# Altium PCB 海关全向控制器主控板电路V3.PcbDoc (part 2 of 3)
Units mil, origin at the board's own origin, x right, y up, seen from the top; angles counter-clockwise.
Board outline 7874.02 x 2362.2 mil, 2 copper layers (Top Layer, Bottom Layer), stack 42.17 mil thick; 192 components, 119 nets, 573 pads, 115 vias.
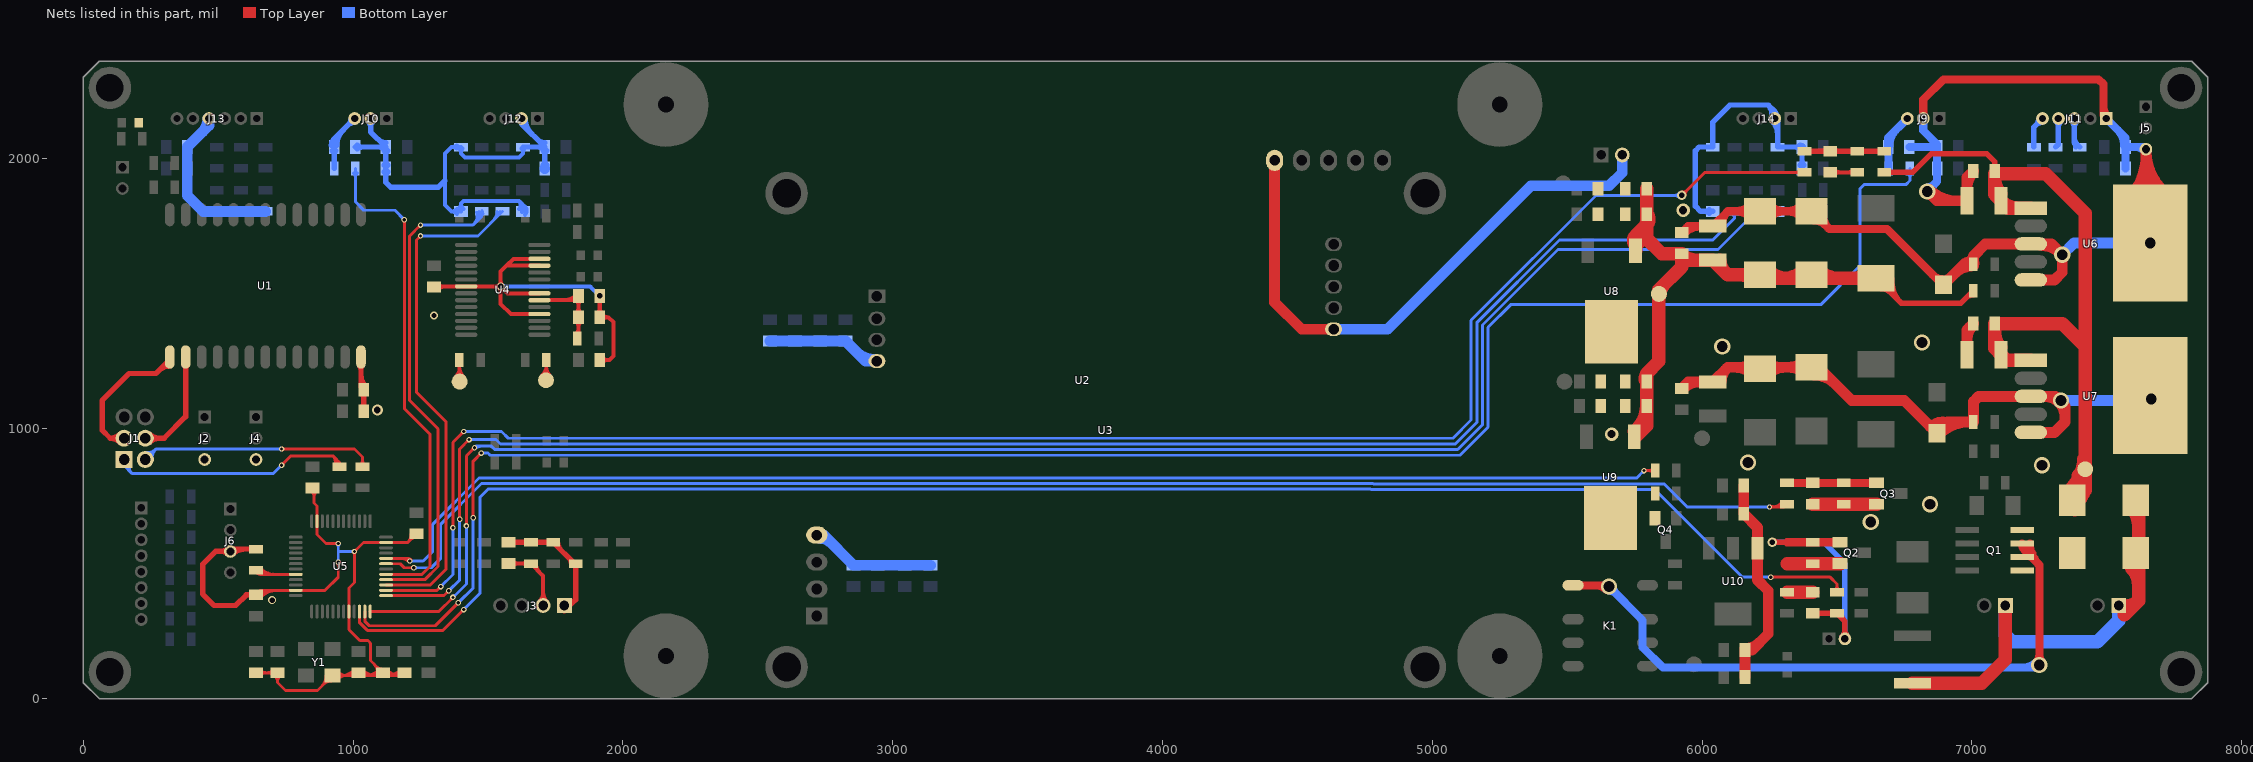
[diagram p2: the nets of this part, all layers, seen from the top]

## Via types
v1: diameter 20, hole 12, Top Layer to Bottom Layer, tented both sides, 70 vias
v2: diameter 60, hole 40, Top Layer to Bottom Layer, tented both sides, 26 vias
v3: diameter 50, hole 30, Top Layer to Bottom Layer, tented both sides, 9 vias
v4: diameter 30, hole 20, Top Layer to Bottom Layer, tented both sides, 5 vias
v5: diameter 40, hole 25, Top Layer to Bottom Layer, tented both sides, 3 vias
v6: diameter 35, hole 20, Top Layer to Bottom Layer, tented both sides, 2 vias

## Nets (pads, with @x,y where several pads share a name; then routed paths per layer and width w, separated by ;. In a path a pad name is that pad's centre, name@x,y a point inside that pad or via, vN(x,y) a via of type N, cw(c..) or ccw(c..) an arc to the next point about the centre after c; other vN are vias at no path point) (continued)
+7.2V: C25.1 C26.1 C27.1 C28.2 C42.1 C43.2 C46.1 C47.2 L2.2 pad.@5840,1500 R20.1 U8.1 U9.1 | length 3613.7
  Top Layer w20: L2.2@6645,1558.41 6738.41,1465 ; L2.2@6664.68,1519.2 cw(c6664.68,1472.06) 6698.02,1505.39 ; L2.2@6683.86,1557.27 ccw(c6763.03,1552.54) 6706.95,1496.46 ; L2.2@6703.83,1556.08 ccw(c6822.4,1549) 6738.41,1465 ; 6979.02,1485.31 cw(c7005.63,1458.69) R20.1@7005.63,1496.33 ; R20.1@7005.63,1511.92 6958.71,1465 6738.41,1465
  Top Layer w50: U9.1@5748.58,990.12 ccw(c5748.58,1050.19) 5791.06,1007.71 ; U9.1@5749.45,990.43 ccw(c5672.36,1084.99) C47.2@5794.37,1085 ; U8.1@5752.2,1681.5 cw(c5830.33,1681.5) 5775.09,1736.74 ; U8.1@5752.55,1680.58 cw(c5771.46,1697.36) 5753.58,1715.24 ; U9.1@5753.58,970.24 5794.37,1011.02 C47.2@5794.37,1085 ; U8.1@5753.58,1660.24 5753.58,1715.24 ; U8.1@5754.36,1680.36 ccw(c5702.82,1756.02) 5794.37,1756.02 ; 5780.06,1741.71 ccw(c5732.68,1789.09) C43.2@5799.69,1789.09 ; C46.1@5789.06,1180.91 cw(c5832.87,1180.91) 5801.89,1211.89 ; C42.1@5794.37,1890 C43.2@5794.37,1795 5794.37,1756.02 ; C43.2@5798.95,1791.78 cw(c5773.52,1776.87) 5794.37,1756.02 ; pad.@5844.53,1500 cw(c5891.67,1500) 5858.34,1533.34 ; 5925,1625.34 5925,1600 5840,1515 5840,1290 5840,1250 5794.37,1204.37 C46.1@5794.37,1175 C47.2@5794.37,1085 ; C28.2@5927.15,1645.2 ccw(c5975.1,1693.16) 5975.1,1625.34 ; C27.1@6066.18,1625.34 ccw(c6129.39,1625.34) 6084.69,1580.65 ; C26.1@6188.04,1553.1 ccw(c6146.7,1511.77) 6146.7,1570.22 ccw(c6146.7,1628.68) C26.1@6188.04,1587.34 ; C26.1@6241.96,1587.34 ccw(c6311.81,1657.19) 6311.81,1558.41 ; 6308.19,1558.41 ccw(c6308.19,1657.19) C25.1@6378.04,1587.34 ; C25.1@6431.96,1587.34 ccw(c6501.81,1657.19) 6501.81,1558.41 ; L2.2@6608.19,1541.29 ccw(c6566.86,1499.96) 6566.86,1558.41 ccw(c6566.86,1616.87) L2.2@6608.19,1575.53 ; L2.2@6645,1558.41 6226.81,1558.41 C26.1@6215,1570.22 6095.12,1570.22 C27.1@6040,1625.34 5948.62,1625.34 C28.2@5925,1648.96 5851.04,1648.96 5794.37,1705.63 5794.37,1756.02 ; 5753.58,1715.24 5794.37,1756.02
+12V: C23.1 C24.2 C30.1 C31.2 C32.1 C33.1 K1.1 pad.@7420,850 Q1.5 Q1.6 Q1.7 Q1.8 R31.1 U6.1 U7.1 | length 6140.2
  Top Layer w20: R31.1@6675,1950.63 6780.63,1950.63 6850,2020 7055,2020 7084.37,1990.63 C24.2@7084.37,1955 C24.2@7084.37,1945 ; C24.2@7077.52,1967.75 ccw(c7060.99,1984.29) 7084.37,1984.29 ccw(c7107.75,1984.29) C24.2@7091.22,1967.75
  Top Layer w30: K1.1@5522.2,419.61 5654.61,419.61 v2(5654.61,415.39) ; 5608.22,419.61 cw(c5608.22,369.01) v2@5644,404.79 ; Q1.7@7185.67,575 ccw(c7223.5,575) 7196.75,548.25 ; 7195,550 7250,495 v2(7250,125) ; Q1.7@7215.67,575 ccw(c7325.92,575) 7247.96,497.04 ; Q1.6@7219.4,528.14 cw(c7216.21,509.77) 7231.46,520.5 ; Q1.6@7221.55,523.29 ccw(c7205.51,533.46) 7224.04,537.61 ; v2@7239.39,135.61 ccw(c7213.79,161.21) 7250,161.21 ccw(c7286.21,161.21) v2@7260.61,135.61
  Top Layer w50: 7084.37,1356.26 ccw(c7161.69,1356.26) C30.1@7107.02,1301.58 ; 7084.37,1926.26 ccw(c7161.69,1926.26) C23.1@7107.02,1871.58 ; U6.1@7183.56,1818.33 cw(c7173.65,1910.65) C23.1@7107.99,1845 ; U7.1@7218.56,1253.33 7129.66,1253.33 C30.1@7107.99,1275 7084.37,1298.62 C31.2@7084.37,1390 7335,1390 7420,1305 ; U6.1@7218.56,1818.33 7134.66,1818.33 C23.1@7107.99,1845 ; C33.1@7354.77,761.96 ccw(c7197.29,919.45) 7420,919.45 ; C33.1@7381.89,700 7381.89,735 7420,773.11 7420,1305 ; C33.1@7390.12,726.61 ccw(c7318,798.73) 7420,798.73 ; 7394.59,826.5 cw(c7430.86,804.12) pad.@7421.04,845.59 ; 7414.68,886.49 ccw(c7457.04,879.64) pad.@7423.53,852.83 ; C23.1@7107.99,1845 7084.37,1868.62 7084.37,1945 7273.78,1945 7420,1798.78 7420,1305
  Bottom Layer w30: v2@5654.61,400.39 cw(c5654.61,364.18) 5680.21,389.79 cw(c5705.82,415.39) v2@5669.61,415.39 ; v2(5654.61,415.39) 5780,290 5780,190 5855,115 7240,115 v2(7250,125) ; 7189.64,115 ccw(c7189.64,185.36) v2@7239.39,135.61
AD1: R48.2 U5.15 | length 1964.2
  Top Layer w11: U5.15@1122.32,421.1 1286.1,421.1 1345,480 1345,1025 1235,1135 1235,1700 v1(1250,1715) ; v1@1245.5,1715 cw(c1234.64,1715) 1242.32,1707.32 cw(c1250,1699.64) v1@1250,1710.5
  Bottom Layer w11: v1(1250,1715) 1462.7,1715 R48.2@1553.33,1805.63 ; v1@1253.18,1711.82 cw(c1260.86,1704.14) 1260.86,1715 cw(c1260.86,1725.86) v1@1253.18,1718.18 ; 1519.04,1771.33 ccw(c1484.74,1805.63) R48.2@1533.24,1805.63 ; R48.2@1537.81,1790.11 ccw(c1522.3,1805.63) R48.2@1544.24,1805.63
AD2: R51.2 U5.16 | length 1978.5
  Top Layer w11: U5.16@1122.32,440.79 1265.79,440.79 1315,490 1315,1000 1210,1105 1210,1715 v1(1250,1755) ; v1@1245.5,1755 cw(c1234.64,1755) 1242.32,1747.32 cw(c1250,1739.64) v1@1250,1750.5
  Bottom Layer w11: v1(1250,1755) 1445,1755 ; v1@1253.18,1751.82 cw(c1260.86,1744.14) 1260.86,1755 cw(c1260.86,1765.86) v1@1253.18,1758.18 ; R51.2@1457.01,1802.68 cw(c1411.11,1788.89) 1445,1755 ; 1458.02,1768.02 ccw(c1431.13,1794.9) R51.2@1467.54,1805.85 ; 1471.03,1781.03 ccw(c1451.15,1800.92) R51.2@1478.08,1809.01 ; R51.2@1471.05,1797.06 cw(c1464.25,1786.67) 1476.67,1786.67 ; R51.2@1476.67,1805.63 1476.67,1786.67 ; R51.2@1482.28,1797.06 ccw(c1489.09,1786.67) 1476.67,1786.67 ; 1445,1755 1476.67,1786.67
AD3: R63.2 U5.12 | length 6420.3
  Top Layer w11: U5.12@1063.27,322.68 1317.68,322.68 v1(1370,375) ; v1@1365.5,375 cw(c1354.64,375) 1362.32,367.32 cw(c1370,359.64) v1@1370,370.5 ; v1@1416.82,643.18 ccw(c1409.14,650.86) 1420,650.86 ccw(c1430.86,650.86) v1@1423.18,643.18 ; v1(1420,640) 1420,900 v1(1450,930) ; v1@1445.5,930 cw(c1434.64,930) 1442.32,922.32 cw(c1450,914.64) v1@1450,925.5
  Bottom Layer w11: v1(1370,375) 1420,425 v1(1420,640) ; v1@1370,379.5 ccw(c1370,390.36) 1377.68,382.68 ccw(c1385.36,375) v1@1374.5,375 ; v1@1416.82,636.82 cw(c1409.14,629.14) 1420,629.14 cw(c1430.86,629.14) v1@1423.18,636.82 ; v1(1450,930) 1455.5,935.5 1512.5,935.5 1525,923 5094.21,923 5186,1014.79 5186,1384.79 5466.21,1665 6059.37,1665 R63.2@6200,1805.63 ; v1@1453.18,926.82 cw(c1474.14,905.86) 1474.14,935.5 ; 6165.7,1771.33 ccw(c6131.41,1805.63) R63.2@6179.91,1805.63 ; R63.2@6184.48,1790.11 ccw(c6168.96,1805.63) R63.2@6190.91,1805.63
AD4: R66.2 U5.13 | length 6257.8
  Top Layer w11: U5.13@1122.32,381.73 1336.73,381.73 v1(1355,400) ; v1@1350.5,400 cw(c1339.64,400) 1347.32,392.32 cw(c1355,384.64) v1@1355,395.5 ; v1@1391.82,668.18 ccw(c1384.14,675.86) 1395,675.86 ccw(c1405.86,675.86) v1@1398.18,668.18 ; v1(1395,665) 1395,925 v1(1430,960) ; v1@1425.5,960 cw(c1414.64,960) 1422.32,952.32 cw(c1430,944.64) v1@1430,955.5
  Bottom Layer w11: v1(1355,400) 1395,440 v1(1395,665) ; v1@1355,404.5 ccw(c1355,415.36) 1362.68,407.68 ccw(c1370.36,400) v1@1359.5,400 ; v1@1391.82,661.82 cw(c1384.14,654.14) 1395,654.14 cw(c1405.86,654.14) v1@1398.18,661.82 ; v1(1430,960) 1530,960 1546,944 5085.51,944 5165,1023.49 5165,1393.49 5471.51,1700 6040,1700 6120,1780 R66.2@6120,1805.63 ; v1@1433.18,956.82 cw(c1440.86,949.14) 1440.86,960 cw(c1440.86,970.86) v1@1433.18,963.18 ; R66.2@6112.75,1798.38 cw(c6095.26,1780.89) 6120,1780.89 cw(c6144.74,1780.89) R66.2@6127.25,1798.38
AD_KEY1: R36.1 U5.11 | length 7304.8
  Top Layer w11: U5.11@1043.58,322.68 1043.58,286.42 1060,270 1305,270 v1(1390,355) ; v1@1385.5,355 cw(c1374.64,355) 1382.32,347.32 cw(c1390,339.64) v1@1390,350.5 ; v1@1441.82,673.18 ccw(c1434.14,680.86) 1445,680.86 ccw(c1455.86,680.86) v1@1448.18,673.18 ; v1(1445,670) 1445,880 v1(1475,910) ; v1@1470.5,910 cw(c1459.64,910) 1467.32,902.32 cw(c1475,894.64) v1@1475,905.5
  Bottom Layer w11: v1(1390,355) 1445,410 v1(1445,670) ; v1@1390,359.5 ccw(c1390,370.36) 1397.68,362.68 ccw(c1405.36,355) v1@1394.5,355 ; v1@1441.82,666.82 cw(c1434.14,659.14) 1445,659.14 cw(c1455.86,659.14) v1@1448.18,666.82 ; v1(1475,910) 1500,910 1508,902 5102.9,902 5207,1006.1 5207,1376.1 5290.9,1460 6440,1460 6585,1605 6585,1890 6600,1905 6755,1905 6770.54,1920.54 R36.1@6770.54,1964.79 ; v1@1478.18,906.82 cw(c1485.86,899.14) 1485.86,910 cw(c1485.86,920.86) v1@1478.18,913.18 ; R36.1@6763.29,1947.7 cw(c6745.79,1930.21) 6770.54,1930.21 cw(c6795.28,1930.21) R36.1@6777.78,1947.7
AD_KEY2: R41.1 U5.17 | length 1904.6
  Top Layer w11: U5.17@1122.32,460.47 1255.47,460.47 1285,490 1285,980 1190,1075 v1(1190,1775) ; v1@1186.82,1771.82 cw(c1179.14,1764.14) 1190,1764.14 cw(c1200.86,1764.14) v1@1193.18,1771.82
  Bottom Layer w11: R41.1@1001.32,1947.7 cw(c983.83,1930.21) 1008.57,1930.21 cw(c1033.31,1930.21) R41.1@1015.81,1947.7 ; R41.1@1008.57,1964.79 1008.57,1841.43 1040,1810 1155,1810 v1(1190,1775) ; v1@1185.5,1775 ccw(c1174.64,1775) 1182.32,1782.68 ccw(c1190,1790.36) v1@1190,1779.5
AD_POW: R33.1 U5.14 | length 6656.1
  Top Layer w11: U5.14@1122.32,401.42 1311.42,401.42 v1(1325,415) ; v1@1320.5,415 cw(c1309.64,415) 1317.32,407.32 cw(c1325,399.64) v1@1325,410.5 ; v1@1366.82,636.18 ccw(c1359.14,643.86) 1370,643.86 ccw(c1380.86,643.86) v1@1373.18,636.18 ; v1(1370,633) 1370,950 v1(1410,990) ; v1@1405.5,990 cw(c1394.64,990) 1402.32,982.32 cw(c1410,974.64) v1@1410,985.5 ; v6(5925,1865) 6010.63,1950.63 R33.1@6380,1950.63 ; v6@5925,1877 ccw(c5925,1905.97) 5945.49,1885.49 ccw(c5965.97,1865) v6@5937,1865 ; R33.1@6362.91,1943.38 ccw(c6345.42,1925.89) 6345.42,1950.63 ccw(c6345.42,1975.37) R33.1@6362.91,1957.88
  Bottom Layer w11: v1(1325,415) 1370,460 v1(1370,633) ; v1@1325,419.5 ccw(c1325,430.36) 1332.68,422.68 ccw(c1340.36,415) v1@1329.5,415 ; v1@1366.82,629.82 cw(c1359.14,622.14) 1370,622.14 cw(c1380.86,622.14) v1@1373.18,629.82 ; v1(1410,990) 1550,990 1575,965 5076.81,965 5144,1032.19 5144,1402.19 5606.81,1865 v6(5925,1865) ; v1@1413.18,986.82 cw(c1420.86,979.14) 1420.86,990 cw(c1420.86,1000.86) v1@1413.18,993.18 ; v6@5916.51,1856.51 ccw(c5896.03,1836.03) 5896.03,1865 ccw(c5896.03,1893.97) v6@5916.51,1873.49
AD_POWKEY: R24.1 U5.10 | length 6237.7
  Top Layer w11: U5.10@1023.9,322.68 1023.9,281.1 1024.86,281.1 1052.96,253 1333,253 v1(1410,330) ; v1@1405.5,330 cw(c1394.64,330) 1402.32,322.32 cw(c1410,314.64) v1@1410,325.5 ; v1(6255,450) 6475,450 6500,425 R24.1@6500,394.37 ; v1@6258.18,446.82 cw(c6265.86,439.14) 6265.86,450 cw(c6265.86,460.86) v1@6258.18,453.18 ; R24.1@6492.75,401.62 ccw(c6475.26,419.11) 6500,419.11 ccw(c6524.74,419.11) R24.1@6507.25,401.62
  Bottom Layer w11: v1(1410,330) 1470.5,390.5 1470.5,746.56 1499.94,776 4771.89,776 4772.89,775 5825,775 6150,450 v1(6255,450) ; v1@1410,334.5 ccw(c1410,345.36) 1417.68,337.68 ccw(c1425.36,330) v1@1414.5,330 ; v1@6251.82,446.82 ccw(c6244.14,439.14) 6244.14,450 ccw(c6244.14,460.86) v1@6251.82,453.18
AGND1: J16.2 U2.5 U3.9 | length 2161.9
  Top Layer w40: U2.5@4415.78,1994.98 4415.78,1469.22 4515.98,1369.02 U3.9@4634.49,1369.02
  Bottom Layer w40: U3.9@4634.49,1369.02 4834.02,1369.02 5365.5,1900.5 5655.5,1900.5 5704.37,1949.37 J16.2@5704.37,2015
BOOT0: R18.2 U5.44 | length 271.6
  Top Layer w11: R18.2@640,475.63 655.16,460.47 U5.44@787.68,460.47 ; R18.2@641.53,467.32 ccw(c658.06,483.85) R18.2@658.06,460.47 ; R18.2@649.31,475.1 ccw(c684.62,510.41) 684.62,460.47 ; R18.2@657.09,482.88 ccw(c711.18,536.96) 711.18,460.47
BT_RX: J1.4 U1.2 | length 505
  Top Layer w20: J1.4@230,965 300,965 379.72,1044.72 U1.2@379.72,1256.22 ; J1.4@245.2,949.8 cw(c281.9,913.1) 281.9,965 cw(c281.9,1016.9) J1.4@245.2,980.2 ; U1.2@374.27,1235.17 cw(c361.09,1222) 379.72,1222 cw(c398.35,1222) U1.2@385.18,1235.17
BT_TX: J1.3 U1.1 | length 641.2
  Top Layer w20: J1.3@135.93,949.93 ccw(c100,914.64) 100,965 ; J1.3@135.93,980.07 cw(c100,1015.36) 100,965 ; J1.3@151.26,965 100,965 ; 280.88,1216.43 cw(c320.67,1176.65) U1.1@320.67,1232.91 ; U1.1@320.67,1256.22 269.45,1205 170,1205 70,1105 70,995 100,965
CTRPOW: R27.1 U5.19 | length 5597.6
  Top Layer w11: U5.19@1122.32,499.84 1175.16,499.84 1190,485 v1(1225,485) ; v1@1221.82,481.82 ccw(c1214.14,474.14) 1214.14,485 ccw(c1214.14,495.86) v1@1221.82,488.18 ; v1(6250,710) 6304.35,710 R27.1@6315,720.65 ; v1@6252.25,713.9 ccw(c6259.76,726.9) 6263.64,712.4 ; v1@6253.18,706.82 cw(c6260.86,699.14) 6260.86,710 cw(c6260.86,720.86) v1@6253.18,713.18 ; v1@6254.7,710 ccw(c6254.7,771.11) R27.1@6297.91,727.9 ; 6281.25,710 ccw(c6281.25,744.56) R27.1@6305.69,720.12
  Bottom Layer w11: v1(1225,485) 1290,485 1325,520 1325,646.21 1475.79,797 4780.59,797 4781.59,796 5859,796 5945,710 v1(6250,710) ; v1@1228.18,481.82 cw(c1235.86,474.14) 1235.86,485 cw(c1235.86,495.86) v1@1228.18,488.18 ; v1@6246.82,706.82 ccw(c6239.14,699.14) 6239.14,710 ccw(c6239.14,720.86) v1@6246.82,713.18
CTRVBT: R30.1 U5.20 | length 5060.4
  Top Layer w11: U5.20@1122.32,519.53 1200.47,519.53 v1(1210,510) ; 1176.14,519.53 cw(c1176.14,476.14) v1@1206.82,506.82 ; 1202.69,519.53 cw(c1202.69,502.69) v1@1214.6,514.6 ; v1@1205.5,510 ccw(c1194.64,510) 1202.32,517.68 ccw(c1210,525.36) v1@1210,514.5 ; v1(5785,845) R30.1@5825.63,845 ; v1@5788.18,841.82 cw(c5795.86,834.14) 5795.86,845 cw(c5795.86,855.86) v1@5788.18,848.18 ; R30.1@5818.38,837.75 ccw(c5800.89,820.26) 5800.89,845 ccw(c5800.89,869.74) R30.1@5818.38,852.25
  Bottom Layer w11: v1(1210,510) 1260,510 1295,545 1295,645.9 1467.1,818 4789.29,818 4790.29,817 5757,817 v1(5785,845) ; v1@1213.18,506.82 cw(c1220.86,499.14) 1220.86,510 cw(c1220.86,520.86) v1@1213.18,513.18 ; v1@5780.5,845 cw(c5769.64,845) 5777.32,837.32 cw(c5785,829.64) v1@5785,840.5
DATA_RX: J1.2 R40.2 | length 1067.1
  Top Layer w11: v1(735,925) 1005,925 1035,895 R40.2@1035,859.37 ; v1@738.18,921.82 cw(c745.86,914.14) 745.86,925 cw(c745.86,935.86) v1@738.18,928.18 ; R40.2@1027.75,866.62 ccw(c1010.26,884.11) 1035,884.11 ccw(c1059.74,884.11) R40.2@1042.25,866.62
  Bottom Layer w11: J1.2@230,886.26 268.74,925 ; J1.2@231.51,901.18 ccw(c234.1,926.85) 252.35,908.61 ccw(c270.59,890.36) J1.2@244.92,887.77 ; J1.2@232.61,912.12 ccw(c237.11,956.63) 268.74,925 ; J1.2@255.86,888.87 cw(c300.37,893.37) 268.74,925 ; v1@731.82,921.82 ccw(c724.14,914.14) 724.14,925 ccw(c724.14,935.86) v1@731.82,928.18 ; v1(735,925) 268.74,925
DATA_TX: J1.1 R39.2 | length 1096.7
  Top Layer w11: v1(735,865) 770,900 925,900 ; v1@735,869.5 ccw(c735,880.36) 742.68,872.68 ccw(c750.36,865) v1@739.5,865 ; R39.2@930.97,863.9 ccw(c902.79,877.79) 925,900 ; 935.86,889.14 cw(c917.33,870.62) R39.2@940.83,859.04 ; 946.72,878.28 cw(c931.88,863.45) R39.2@950.7,854.17 ; R39.2@950,859.37 950,875 925,900
  Bottom Layer w11: J1.1@151.26,886.26 151.26,863.74 180,835 ; J1.1@164.49,879.2 ccw(c189.74,865.73) 169.5,845.5 ; J1.1@174.2,874.02 ccw(c203.42,858.43) 180,835 ; v1@730.5,865 cw(c719.64,865) 727.32,857.32 cw(c735,849.64) v1@735,860.5 ; v1(735,865) 705,835 180,835
DIG_RX: J11.3 R42.1 | length 243.4
  Bottom Layer w20: J11.3@7370.37,2140.37 cw(c7347.11,2117.11) 7380,2117.11 cw(c7412.89,2117.11) J11.3@7389.63,2140.37 ; 7380,2082.77 ccw(c7428.56,2082.77) R42.1@7394.22,2048.43 ; J11.3@7380,2150 7380,2064.37 ; R42.1@7384.65,2046.01 ccw(c7366.92,2051.29) 7380,2064.37 ; R42.1@7391.45,2049.97 cw(c7394.78,2064.37) 7380,2064.37 ; R42.1@7400,2044.37 7380,2064.37
DIG_SET: J11.5 R44.1 | length 170.5
  Bottom Layer w20: R44.1@7230,2044.37 7230,2118.11 J11.5@7261.89,2150 ; J11.5@7248.27,2150 cw(c7215.38,2150) 7238.64,2126.75 cw(c7261.89,2103.49) J11.5@7261.89,2136.38
DIG_TX: J11.4 R43.1 | length 175.7
  Bottom Layer w20: R43.1@7310,2044.37 7320.94,2055.31 J11.4@7320.94,2150 ; J11.4@7311.31,2140.37 cw(c7288.06,2117.11) 7320.94,2117.11 cw(c7353.83,2117.11) J11.4@7330.58,2140.37 ; R43.1@7315.78,2048.43 ccw(c7303.3,2060.91) 7320.94,2060.91
FT_D+: pad.@1715,1180 R13.2 | length 234.1
  Top Layer w11: pad.@1698.01,1196.99 ccw(c1653.57,1241.43) R13.2@1716.42,1241.43 ; pad.@1705.79,1189.21 ccw(c1680.13,1214.87) 1716.42,1214.87 ; R13.2@1709.17,1237.91 cw(c1691.68,1220.42) 1716.42,1220.42 cw(c1741.16,1220.42) R13.2@1723.66,1237.91 ; pad.@1715,1180 1716.42,1181.42 R13.2@1716.42,1255 ; R13.2@1716.42,1234.59 ccw(c1769.59,1234.59) pad.@1731.99,1196.99
FT_D-: pad.@1395,1175 R12.2 | length 239.1
  Top Layer w11: pad.@1378.01,1191.99 ccw(c1340.41,1229.59) R12.2@1393.58,1229.59 ; R12.2@1386.34,1237.91 cw(c1368.84,1220.42) 1393.58,1220.42 cw(c1418.32,1220.42) R12.2@1400.83,1237.91 ; 1393.58,1209.87 ccw(c1429.87,1209.87) pad.@1404.21,1184.21 ; R12.2@1393.58,1236.43 ccw(c1456.43,1236.43) pad.@1411.99,1191.99 ; R12.2@1393.58,1255 1393.58,1176.42 pad.@1395,1175
FT_VCC: C10.1 C11.2 R11.1 U4.20 | length 547.1
  Top Layer w15: U4.20@1690.83,1476.61 1819.8,1476.61 C11.2@1835.63,1492.44 C10.1@1835.63,1413.29 1835.63,1338.08 R11.1@1831.69,1334.15 ; 1782.26,1476.61 ccw(c1782.26,1539.91) C11.2@1827.01,1495.15 ; C11.2@1818.47,1476.61 ccw(c1818.47,1503.69) C11.2@1837.62,1484.55 ; R11.1@1825.86,1349.82 ccw(c1802.28,1373.41) 1835.63,1373.41 ; C10.1@1827.01,1398.77 cw(c1806.21,1377.97) 1835.63,1377.97 cw(c1865.05,1377.97) C10.1@1844.25,1398.77 ; C10.1@1827.01,1427.82 ccw(c1806.21,1448.62) 1835.63,1448.62 ccw(c1865.05,1448.62) C10.1@1844.25,1427.82 ; C11.2@1827.01,1477.92 cw(c1806.21,1457.12) 1835.63,1457.12 cw(c1865.05,1457.12) C11.2@1844.25,1477.92
GND: C1.2 C2.1 C3.2 C4.2 C5.1 C6.2 C7.2 C8.2 C9.1 C10.2 C11.1 C12.1 C13.2 C14.1 C15.2 C16.2 C17.2 C18.2 C19.2 C20.1 C21.1 C23.2 C24.1 C25.2 C26.2 C27.2 C28.1 C30.2 C31.1 C32.2 C33.2 C34.2 C35.2 C36.2 C37.2 C38.1 C39.1 C40.1 C41.1 C42.2 C43.1 C44.2 C45.1 C46.2 C47.1 C48.2 C49.1 C50.2 C51.1 C52.2 C53.1 C54.2 C55.2 C56.2 C57.2 C58.2 C59.2 C60.2 C61.2 C62.1 C63.1 C64.2 C65.2 C66.2 C67.2 C68.1 C69.1 C70.2 C71.2 C73.2 D1.2 D6.2 D7.1 D9.1 J2.3 J3.2 J4.3 J5.3 J6.3 J7.1 J8.1 J9.2 J10.2 J11.1 J12.2 J13.4 J14.2 Q2.2 Q3.2 Q4.2 R8.2 R18.1 R19.2 R23.2 R26.2 R28.2 R32.2 R34.1 R35.1 R54.2 R55.1 R56.1 R57.1 R58.1 R70.2 R71.1 U1.13 U2.4 U3.4 U4.7 U4.18 U4.21 U4.25 U4.26 U5.8 U5.23 U5.35 U5.47 U6.0 U6.3 U6.5 U7.0 U7.3 U7.5 U8.2 U9.2 U10.1 Y1.2 | length 26018.7
  Top Layer w11: C20.1@640,95.63 C21.1@720,95.63 720,60 750,30 868.43,30 Y1.2@924.21,85.79 1180.93,85.79 C14.1@1190.77,95.63 ; C16.2@640,384.37 657.05,401.42 U5.47@787.68,401.42 896.42,401.42 945,450 v1(945,505) ; C16.2@640.38,389.9 cw(c668.19,362.08) 668.19,401.42 ; C16.2@648.16,382.12 cw(c694.75,335.53) 694.75,401.42 ; C20.1@655.94,85.6 cw(c680.15,61.38) 680.15,95.63 cw(c680.15,129.88) C20.1@655.94,105.66 ; C16.2@655.94,374.34 cw(c721.31,308.97) 721.31,401.42 ; C21.1@704.06,85.6 ccw(c679.85,61.38) 679.85,95.63 ccw(c679.85,129.88) C21.1@704.06,105.66 ; C21.1@709.97,85.6 cw(c685.75,61.38) 720,61.38 cw(c754.25,61.38) C21.1@730.03,85.6 ; C17.2@845.88,770.6 cw(c823.85,748.57) 855,748.57 ; 855,744.2 cw(c892.34,744.2) C17.2@865.94,770.6 ; C17.2@855,775.63 855,725 866.42,713.58 U5.35@866.42,657.32 866.42,608.18 899.59,575 v1(945,575) ; 883.2,44.77 ccw(c842.18,85.79) Y1.2@900.19,85.79 ; 892.7,54.27 cw(c920.28,26.7) Y1.2@920.28,65.7 ; Y1.2@901.97,63.55 ccw(c879.73,85.79) Y1.2@911.19,85.79 ; v1@941.82,501.82 cw(c934.14,494.14) 945,494.14 cw(c955.86,494.14) v1@948.18,501.82 ; v1@941.82,571.82 ccw(c934.14,564.14) 934.14,575 ccw(c934.14,585.86) v1@941.82,578.18 ; Y1.2@942.36,71.58 cw(c976.65,37.28) 976.65,85.79 cw(c976.65,134.29) Y1.2@942.36,99.99 ; 956.09,85.79 ccw(c956.09,153.64) C19.2@1004.06,105.66 ; 982.64,85.79 ccw(c982.64,127.08) C19.2@1011.84,97.88 ; v1@1001.82,541.82 cw(c994.14,534.14) 1005,534.14 cw(c1015.86,534.14) v1@1008.18,541.82 ; v1@1005,549.5 ccw(c1005,560.36) 1012.68,552.68 ccw(c1020.36,545) v1@1009.5,545 ; C19.2@1028.16,97.88 ccw(c1057.36,127.08) 1057.36,85.79 ; C19.2@1035.94,105.66 ccw(c1083.91,153.64) 1083.91,85.79 ; 1046.47,85.79 ccw(c1046.47,153.64) C15.2@1094.45,105.66 ; 1073.03,85.79 ccw(c1073.03,127.08) C15.2@1102.23,97.88 ; 1076.09,129.93 cw(c1041.79,95.63) C15.2@1090.3,95.63 ; 1090.35,115.67 ccw(c1104.48,129.8) C15.2@1104.48,109.81 ; C15.2@1110.39,95.63 1065,141.02 1065,205 1055,215 1025,215 984.53,255.47 U5.8@984.53,322.68 984.53,409.53 1005,430 v1(1005,545) 1038.58,578.58 U5.23@1122.32,578.58 1202.95,578.58 ; C15.2@1118.54,97.88 ccw(c1147.74,127.08) 1147.74,85.79 ; C15.2@1126.32,105.66 ccw(c1174.3,153.64) C14.1@1174.3,85.79 ; C15.2@1126.86,85.79 ccw(c1126.86,153.64) C14.1@1174.84,105.66 ; 1153.41,85.79 ccw(c1153.41,127.08) C14.1@1182.61,97.88 ; 1214.96,590.59 cw(c1229.09,576.46) C18.2@1229.09,596.44 ; C18.2@1214.93,609.86 cw(c1173.9,607.64) 1202.95,578.58 ; C18.2@1235,610.63 1202.95,578.58
  Top Layer w15: C13.2@1300,1525.63 1302.17,1527.8 U4.7@1419.17,1527.8 v4(1547.2,1527.8) ; C13.2@1314.52,1517.01 cw(c1340.55,1490.98) 1340.55,1527.8 ; C13.2@1314.52,1534.25 ccw(c1330.09,1549.82) 1330.09,1527.8 ; v4@1547.2,1520.3 cw(c1547.2,1502.19) 1560.01,1514.99 cw(c1572.81,1527.8) v4@1554.7,1527.8 ; v4@1552.51,1522.49 ccw(c1565.31,1509.69) 1547.2,1509.69 ccw(c1529.1,1509.69) 1541.9,1522.49 ccw(c1529.1,1509.69) 1529.1,1527.8 ccw(c1529.1,1545.9) 1541.9,1533.1 ccw(c1529.1,1545.9) 1547.2,1545.9 ccw(c1565.31,1545.9) v4@1552.51,1533.1 ; C6.2@1576,500.63 R8.2@1659,500.63 1704.37,455.26 J3.2@1704.37,325 ; C6.2@1590.52,492.01 cw(c1611.32,471.21) 1611.32,500.63 cw(c1611.32,530.05) C6.2@1590.52,509.25 ; R8.2@1643.32,494.8 ccw(c1629.24,480.72) 1629.24,500.63 ccw(c1629.24,520.54) R8.2@1643.32,506.46 ; R8.2@1677.09,500.63 ccw(c1720.76,500.63) 1689.88,469.75 ; J3.2@1690.19,359.18 ccw(c1655.94,393.43) 1704.37,393.43 ccw(c1752.8,393.43) J3.2@1718.55,359.18 ; U4.18@1690.83,1425.43 1584.57,1425.43 1547.2,1462.8 v4(1547.2,1527.8) ; U4.21@1690.83,1502.2 1572.8,1502.2 v4(1547.2,1527.8) ; U4.25@1690.83,1604.57 1569.57,1604.57 ; U4.26@1690.83,1630.16 1595.16,1630.16 1569.57,1604.57 ; C10.2@1905.75,1427.82 ccw(c1884.95,1448.62) 1914.37,1448.62 ccw(c1943.79,1448.62) C10.2@1922.99,1427.82 ; C11.1@1905.75,1477.92 cw(c1884.95,1457.12) 1914.37,1457.12 cw(c1943.79,1457.12) C11.1@1922.99,1477.92 ; C11.1@1909.07,1487.14 cw(c1896.26,1474.34) 1914.37,1474.34 cw(c1932.48,1474.34) C11.1@1919.67,1487.14 ; C12.1@1914.37,1255 1950,1255 1965,1270 1965,1395 1946.71,1413.29 C10.2@1914.37,1413.29 v4(1914.37,1492.44) ; C12.1@1922.99,1246.38 cw(c1943.79,1225.58) 1943.79,1255 cw(c1943.79,1284.42) C12.1@1922.99,1263.62 ; C10.2@1922.99,1404.68 cw(c1943.79,1383.88) 1943.79,1413.29 cw(c1943.79,1442.71) C10.2@1922.99,1421.91 ; C41.1@6475,1950.63 R34.1@6575,1950.63 ; C41.1@6489.52,1942.01 cw(c6510.32,1921.21) 6510.32,1950.63 cw(c6510.32,1980.05) C41.1@6489.52,1959.25 ; R34.1@6559.33,1944.8 ccw(c6545.25,1930.72) 6545.25,1950.63 ccw(c6545.25,1970.54) R34.1@6559.33,1956.46 ; v4(1547.2,1527.8) 1547.2,1582.2 1569.57,1604.57
  Top Layer w20: J6.3@535.37,536 ccw(c512.11,512.74) 512.11,545.63 ccw(c512.11,578.52) J6.3@535.37,555.26 ; J6.3@554.63,536 cw(c598.99,491.64) 598.99,554.37 ; C16.2@627.25,377.52 ccw(c610.71,360.99) 610.71,384.37 ccw(c610.71,407.75) C16.2@627.25,391.22 ; C16.2@640,384.37 604.37,384.37 565,345 485,345 442.5,387.5 442.5,497.5 490.63,545.63 J6.3@545,545.63 553.74,554.37 R18.1@640,554.37 ; U1.13@1023.87,1235.17 cw(c1010.7,1222) 1029.33,1222 cw(c1047.96,1222) U1.13@1034.79,1235.17 ; 1029.33,1198.52 ccw(c1086.99,1198.52) C2.1@1046.22,1157.75 ; U1.13@1029.33,1256.22 1029.33,1155.04 C2.1@1039.37,1145 C1.2@1039.37,1065 ; C1.2@1032.52,1077.75 ccw(c1015.99,1094.29) 1039.37,1094.29 ccw(c1062.75,1094.29) C1.2@1046.22,1077.75 ; C2.1@1032.52,1132.25 cw(c1015.99,1115.71) 1039.37,1115.71 cw(c1062.75,1115.71) C2.1@1046.22,1132.25
  Top Layer w30: C28.1@5925,1727.7 5948.62,1751.33 C27.2@6040,1751.33 6095.12,1806.44 ; C28.1@5934.22,1724.39 cw(c5999.24,1659.36) C27.2@5999.24,1751.33 ; C28.1@5935.59,1727.7 cw(c5961.16,1727.7) C28.1@5943.08,1745.78 ; C27.2@6076.13,1752.28 cw(c6141.94,1759.62) 6095.12,1806.44 ; C26.2@6180.97,1782.25 ccw(c6122.56,1723.85) 6122.56,1806.44 ccw(c6122.56,1889.04) C26.2@6180.97,1830.64 ; C26.2@6249.03,1782.25 cw(c6307.44,1723.85) 6307.44,1806.44 cw(c6307.44,1889.04) C26.2@6249.03,1830.64 ; C25.2@6370.97,1782.25 ccw(c6312.56,1723.85) 6312.56,1806.44 ccw(c6312.56,1889.04) C25.2@6370.97,1830.64 ; C25.2@6414.84,1772.23 cw(c6414.84,1713.4) 6456.44,1755 ; C25.2@6448.89,1803.07 ccw(c6526.8,1795.36) 6471.44,1740 ; J9.2@6820,2150 6820,2220 6895,2295 7470,2295 7487.68,2277.32 7487.68,2162.32 J11.1@7498.11,2151.89 ; 6854.61,1570.39 ccw(c6895,1610.79) D7.1@6895,1553.66 ; D7.1@6895,1534.21 6890.79,1534.21 6685,1740 6471.44,1740 ; 7487.68,2196 ccw(c7544.11,2196) J11.1@7504.21,2156.1 ; 6095.12,1806.44 C26.2@6215,1806.44 C25.2@6405,1806.44 6471.44,1740
  Top Layer w40: U9.2@5650.63,655.39 U9.2@5665,669.76 ; C38.1@5925,1149.37 5948.62,1172.99 C37.2@6040,1172.99 6095.12,1228.11 C35.2@6405,1228.11 6431.89,1228.11 6555,1105 6749.21,1105 D9.1@6870,984.21 6910.79,1025 R23.2@7005.63,1025 7005.63,1100.63 7025,1120 U7.3@7218.56,1120 7310,1120 7345,1085 7345,1025 7306.67,986.67 U7.5@7218.56,986.67 ; C38.1@5930.68,1149.59 cw(c5987.17,1093.1) 5987.17,1172.99 ; C37.2@6071.18,1172.99 cw(c6146.46,1172.99) 6093.23,1226.22 ; 6122.56,1228.11 cw(c6122.56,1140.51) C36.2@6184.5,1202.45 ; 6146.7,1228.11 ccw(c6146.7,1281.56) C36.2@6184.5,1243.77 ; C51.1@6154.37,790 6154.37,685.63 6205.55,634.45 U10.1@6205.55,557.05 6205.55,439.45 6245,400 6245,240 6185,180 C53.1@6159.37,180 C52.2@6159.37,80 ; C53.1@6159.37,185.59 ccw(c6159.37,260.96) 6212.67,207.67 ; C36.2@6245.5,1202.45 cw(c6307.44,1140.51) 6307.44,1228.11 ; C36.2@6245.5,1243.77 ccw(c6283.3,1281.56) 6283.3,1228.11 ; C35.2@6374.5,1207.45 ccw(c6324.63,1157.58) 6324.63,1228.11 ccw(c6324.63,1298.64) C35.2@6374.5,1248.77 ; C35.2@6414.84,1198.9 cw(c6414.84,1087.22) 6493.81,1166.19 ; v2(6835,1880) 6870,1845 C23.2@6982.01,1845 6982.01,1931.38 C24.1@7005.63,1955 ; v2@6842.07,1887.07 ccw(c6943.64,1988.64) 6943.64,1845 ; D9.1@6845.33,1008.88 ccw(c6870,1033.54) 6870,998.66 ccw(c6870,1033.54) D9.1@6894.67,1008.88 ; D9.1@6849.84,1007.32 cw(c6892.53,964.64) 6892.53,1025 ; D9.1@6878.13,979.04 cw(c6989.09,868.07) 6989.09,1025 ; D7.1@6895,1534.21 6970.79,1610 ; D7.1@6895,1548.66 ccw(c6895,1583.54) D7.1@6919.67,1558.88 ; 6936.61,1575.82 cw(c7005.63,1506.8) R19.2@7005.63,1604.41 ; C30.2@6982.01,1275 6982.01,1366.38 C31.1@7005.63,1390 ; 6982.01,1327.83 cw(c7061.9,1327.83) C31.1@7005.41,1384.32 ; 6982.01,1354.57 cw(c7012.68,1354.57) C31.1@7005.56,1384.4 ; C23.2@6982.01,1892.83 cw(c7061.9,1892.83) C24.1@7005.41,1949.32 ; 6982.01,1919.57 cw(c7012.68,1919.57) C24.1@7005.56,1949.4 ; R19.2@7001.38,1619.84 cw(c7041.3,1619.84) 7013.07,1648.07 ; R19.2@7008.02,1613.52 ccw(c6991.53,1589.26) 6970.79,1610 ; U6.5@7218.56,1551.67 7306.67,1551.67 7335,1580 v2(7335,1645) 7295,1685 U6.3@7218.56,1685 7050,1685 7005.63,1640.63 R19.2@7005.63,1610 6970.79,1610 ; U6.3@7253.56,1680 cw(c7253.56,1567.89) v2@7332.84,1647.16 ; U7.3@7269.64,1120 cw(c7269.64,1044.64) 7322.93,1097.93 cw(c7269.64,1044.64) 7345,1044.64 ; U6.0@7578.14,1850.37 ccw(c7416.74,2011.77) 7645,2011.77 ; U6.0@7606.43,1822.08 ccw(c7513.31,1915.2) 7645,1915.2 ; U6.0@7645,1752.16 ccw(c7725.26,1752.16) U6.0@7668.51,1695.4 ; 7645,1956.04 ccw(c7803.78,1956.04) U6.0@7708.25,1829.21 ; v2(7661.44,1688.33) 7645,1704.77 J5.3@7645,2036.26 ccw(c7864.21,2036.25) U6.0@7732.31,1861.16
  Top Layer w50: R35.1@6315,394.37 C39.1@6410,394.37 ; 6315,500.63 Q2.2@6511.69,500.63 ; C40.1@6410,720.65 R28.2@6525,720.65 Q3.2@6646.67,720.65 ; D6.2@6780,56.42 7036.42,56.42 7124.37,144.37 J8.1@7124.37,345 ; J7.1@7545.27,347.39 ccw(c7569.51,411.71) 7618.11,363.11 ; 7565,310 7618.11,363.11 ; C33.2@7590.99,708.04 cw(c7525.51,642.56) 7618.11,642.56 ; C32.2@7592.9,483.04 cw(c7532.03,422.17) 7618.11,422.17 ; C32.2@7592.9,536.96 ccw(c7532.03,597.83) C32.2@7618.11,597.83 ; C33.2@7618.11,700 7618.11,363.11
  Bottom Layer w11: v1@941.82,508.18 ccw(c934.14,515.86) 945,515.86 ccw(c955.86,515.86) v1@948.18,508.18 ; v1@941.82,571.82 cw(c934.14,564.14) 945,564.14 cw(c955.86,564.14) v1@948.18,571.82 ; v1(945,505) 945,545 ; v1(945,575) 945,545 ; v1@1001.82,541.82 ccw(c994.14,534.14) 994.14,545 ccw(c994.14,555.86) v1@1001.82,548.18 ; v1(1005,545) 945,545
  Bottom Layer w15: R55.1@1384.33,2038.54 ccw(c1370.25,2024.46) 1370.25,2044.37 ccw(c1370.25,2064.28) R55.1@1384.33,2050.2 ; C67.2@1385.48,1797.01 ccw(c1364.68,1776.21) 1364.68,1805.63 ccw(c1364.68,1835.05) C67.2@1385.48,1814.25 ; C67.2@1391.39,1814.26 ccw(c1370.7,1835) 1400,1835 ; R55.1@1394.17,2038.54 cw(c1380.09,2024.46) 1400,2024.46 cw(c1419.91,2024.46) R55.1@1405.83,2038.54 ; C67.2@1408.61,1814.26 cw(c1429.3,1835) 1400,1835 ; v4(1547.2,1527.8) 1879.02,1527.8 v4(1914.37,1492.44) ; v4@1552.51,1522.49 cw(c1565.31,1509.69) 1565.31,1527.8 cw(c1565.31,1545.9) v4@1552.51,1533.1 ; C66.2@1615.31,1814.07 ccw(c1599.38,1829.38) 1615,1845 ; C66.2@1622.69,1815.38 ccw(c1611.72,1830) 1630,1830 ; R54.2@1624.17,2038.54 cw(c1610.09,2024.46) 1630,2024.46 cw(c1649.91,2024.46) R54.2@1635.83,2038.54 ; 1625.82,1834.18 cw(c1610.42,1818.77) C66.2@1626.12,1803.68 ; C66.2@1630,1805.63 1630,1830 ; R54.2@1630,2044.37 1630,2020 1615,2005 1415,2005 1400,2020 R55.1@1400,2044.37 1364.37,2044.37 1340,2020 1340,1920 1340,1830 1364.37,1805.63 C67.2@1400,1805.63 1400,1835 ; C66.2@1636.64,1823.36 cw(c1621.45,1808.17) C66.2@1636.94,1793.29 ; C66.2@1637.31,1815.38 cw(c1648.28,1830) 1630,1830 ; v4@1906.87,1492.44 ccw(c1888.76,1492.44) 1901.57,1505.25 ccw(c1914.37,1518.05) v4@1914.37,1499.94 ; 1400,1835 1410,1845 1615,1845 ; 1615,1845 1630,1830
  Bottom Layer w20: C59.2@1008.57,2044.37 C58.2@1121.43,2044.37 ; C59.2@1015.42,2037.52 cw(c1031.95,2020.99) 1031.95,2044.37 cw(c1031.95,2067.75) C59.2@1015.42,2051.22 ; J10.2@1055.37,2140.37 cw(c1032.11,2117.11) 1065,2117.11 cw(c1097.89,2117.11) J10.2@1074.63,2140.37 ; J10.2@1065,2150 1065,2100.8 C58.2@1121.43,2044.37 ; 1094.82,2070.98 ccw(c1121.43,2097.6) C58.2@1121.43,2059.96 ; C57.2@1114.58,1952.04 cw(c1098.05,1935.5) 1121.43,1935.5 cw(c1144.81,1935.5) C57.2@1128.28,1952.04 ; C57.2@1114.58,1977.54 ccw(c1098.05,1994.08) 1121.43,1994.08 ccw(c1144.81,1994.08) C57.2@1128.28,1977.54 ; C58.2@1114.58,2031.62 cw(c1098.05,2015.08) 1121.43,2015.08 cw(c1144.81,2015.08) C58.2@1128.28,2031.62 ; C58.2@1114.58,2037.52 ccw(c1098.05,2020.99) 1098.05,2044.37 ccw(c1098.05,2067.75) C58.2@1114.58,2051.22 ; 1340,1920 1315,1895 1140,1895 1121.43,1913.57 C57.2@1121.43,1964.79 C58.2@1121.43,2044.37 ; J12.2@1624.53,2150 1624.53,2130.47 C63.1@1710.63,2044.37 ; R54.2@1630,2044.37 C63.1@1710.63,2044.37 ; J12.2@1638.15,2150 ccw(c1718.18,2150) 1661.59,2093.41 ; 1684.02,2070.98 ccw(c1710.63,2097.6) C63.1@1710.63,2059.96 ; C62.1@1703.78,1977.54 ccw(c1687.25,1994.08) 1710.63,1994.08 ccw(c1734.01,1994.08) C62.1@1717.48,1977.54 ; C63.1@1703.78,2031.62 cw(c1687.25,2015.08) 1710.63,2015.08 cw(c1734.01,2015.08) C63.1@1717.48,2031.62 ; C63.1@1703.78,2037.52 ccw(c1687.25,2020.99) 1687.25,2044.37 ccw(c1687.25,2067.75) C63.1@1703.78,2051.22 ; C62.1@1710.63,1964.79 C63.1@1710.63,2044.37 ; C71.2@6027.25,1798.78 ccw(c6010.71,1782.25) 6010.71,1805.63 ccw(c6010.71,1829.01) C71.2@6027.25,1812.48 ; C71.2@6040,1805.63 5994.37,1805.63 5975,1825 5975,2030 5989.37,2044.37 R71.1@6040,2044.37 6040,2137.19 6102.81,2200 6245,2200 ; J14.2@6256.5,2153.97 ccw(c6212.41,2167.41) 6245,2200 ; J14.2@6259.9,2140.37 cw(c6211.36,2091.83) 6280,2091.83 ; J14.2@6261.96,2161.33 ccw(c6252.53,2175.47) 6269.53,2175.47 ; 6268.56,2176.44 cw(c6248.52,2156.4) J14.2@6275.63,2148.14 ; J14.2@6277.09,2161.33 cw(c6286.53,2175.47) 6269.53,2175.47 ; C68.1@6363.78,1977.54 ccw(c6347.25,1994.08) 6370.63,1994.08 ccw(c6394.01,1994.08) C68.1@6377.48,1977.54 ; C69.1@6363.78,2031.62 cw(c6347.25,2015.08) 6370.63,2015.08 cw(c6394.01,2015.08) C69.1@6377.48,2031.62 ; C69.1@6363.78,2037.52 ccw(c6347.25,2020.99) 6347.25,2044.37 ccw(c6347.25,2067.75) C69.1@6363.78,2051.22 ; C68.1@6370.63,1964.79 C69.1@6370.63,2044.37 R70.2@6280,2044.37 6280,2139.53 J14.2@6269.53,2150 6269.53,2175.47 ; 6245,2200 6269.53,2175.47
  Bottom Layer w30: C56.2@6768.57,2044.37 C55.2@6871.43,2044.37 ; J9.2@6820,2150 6820,2105 6871.43,2053.57 C55.2@6871.43,2044.37 ; v2(6835,1880) 6871.43,1916.43 C54.2@6871.43,1964.79 C55.2@6871.43,2044.37 ; v2@6835,1895 ccw(c6835,1931.21) 6860.61,1905.61 ccw(c6886.21,1880) v2@6850,1880 ; J11.1@7498.11,2151.89 J11.1@7498.11,2150 7569.37,2078.74 C61.2@7569.37,2044.37 ; 7541.25,2106.87 cw(c7484.66,2050.28) C61.2@7564.69,2050.28 ; C60.2@7569.37,1964.79 C61.2@7569.37,2044.37 ; 7604.6,2044.37 cw(c7604.6,1995.86) J5.3@7638.9,2030.16 ; J5.3@7645,2036.26 7636.89,2044.37 C61.2@7569.37,2044.37
  Bottom Layer w40: 440.98,2099.62 ccw(c390.6,2150) J13.4@461.85,2150 ; J13.4@465.47,2150 465.47,2124.11 C65.2@385.73,2044.37 C64.2@385.73,1964.79 385.73,1864.27 444.37,1805.63 R56.1@495,1805.63 R57.1@585,1805.63 R58.1@675,1805.63 ; C34.2@2545,1325.63 C73.2@2638.33,1325.63 C8.2@2731.67,1325.63 C9.1@2825,1325.63 2899.72,1250.91 U3.4@2941.57,1250.91 ; U2.4@2718.78,605.98 2743.39,605.98 C5.1@2855,494.37 C4.2@2945,494.37 C7.2@3045,494.37 C3.2@3140,494.37 ; U2.4@2726.65,594.49 cw(c2726.65,526.34) 2774.84,574.53 ; 2864.76,1285.87 ccw(c2935.67,1356.77) U3.4@2935.67,1256.5 ; v2(7330,1105) 7660,1105 v2(7665,1110) ; v2(7335,1645) 7378.33,1688.33 v2(7661.44,1688.33) ; 7628.79,1105 ccw(c7628.79,1146.21) v2@7657.93,1117.07
  Bottom Layer w50: J8.1@7124.37,345 7124.37,235.63 7150,210 7465,210 7544.37,289.37 J7.1@7544.37,345
  other v2: 6625,655 6845,720 7260,865 6170,875 6075,1305 6815,1320
  other v3: 5665,980 5930,1810
  other v4: 700,365 1300,1420
  other v5: 1090,1070
NetC6_1: C6.1 J3.1 R5.2 R7.2 R8.1 | length 599.6
  Top Layer w20: C6.1@1576,579.37 R8.1@1659,579.37 R7.2@1742,579.37 1820.74,500.63 R5.2@1825,500.63 1825,366.89 ; C6.1@1588.75,572.52 cw(c1605.29,555.99) 1605.29,579.37 cw(c1605.29,602.75) C6.1@1588.75,586.22 ; R7.2@1757.59,579.37 ccw(c1795.23,579.37) 1768.61,552.76 ; J3.1@1783.11,325 1825,366.89 ; J3.1@1790.59,360.89 ccw(c1803.52,388.36) 1825,366.89 ; 1801.4,519.97 cw(c1782.06,500.63) R5.2@1809.41,500.63
NetC39_2: C39.2 Q2.1 R24.2 R26.1 S2.2 | length 1257.6
  Top Layer w20: v6(6260,580) 6315.63,580 6315,579.37 ; v6@6265.3,574.7 cw(c6278.11,561.89) 6278.11,580 cw(c6278.11,598.11) v6@6265.3,585.3 ; C39.2@6410,315.63 R24.2@6500,315.63 6529.53,286.1 S2.2@6529.53,221.45 ; C39.2@6422.75,308.78 cw(c6439.29,292.25) 6439.29,315.63 cw(c6439.29,339.01) C39.2@6422.75,322.48 ; R24.2@6515.59,315.63 ccw(c6553.23,315.63) 6526.61,289.02 ; S2.2@6519.9,231.08 ccw(c6496.64,254.34) 6529.53,254.34 ccw(c6562.41,254.34) S2.2@6539.16,231.08
  Top Layer w30: 6315,579.37 Q2.1@6511.69,579.37
  Bottom Layer w20: v6(6260,580) 6450,580 6529.53,500.47 S2.2@6529.53,221.45 ; v6@6265.3,574.7 cw(c6278.11,561.89) 6278.11,580 cw(c6278.11,598.11) v6@6265.3,585.3 ; S2.2@6519.9,231.08 ccw(c6496.64,254.34) 6529.53,254.34 ccw(c6562.41,254.34) S2.2@6539.16,231.08
NetC40_2: C40.2 Q3.1 R27.2 R28.1 | length 331.7
  Top Layer w30: R27.2@6315,799.39 C40.2@6410,799.39 R28.1@6525,799.39 Q3.1@6646.69,799.37
NetC41_2: C41.2 R31.2 R33.2 R34.2 | length 368.5
  Top Layer w20: R33.2@6380,2029.37 C41.2@6475,2029.37 R34.2@6575,2029.37 R31.2@6675,2029.37 ; C41.2@6462.25,2022.52 ccw(c6445.71,2005.99) 6445.71,2029.37 ccw(c6445.71,2052.75) C41.2@6462.25,2036.22 ; C41.2@6487.75,2022.52 cw(c6504.29,2005.99) 6504.29,2029.37 cw(c6504.29,2052.75) C41.2@6487.75,2036.22
NetC56_1: C56.1 J9.3 R36.2 | length 278.6
  Bottom Layer w30: R36.2@6691.8,1964.79 6691.8,2042.4 C56.1@6689.83,2044.37 6689.83,2078.88 J9.3@6760.94,2150 ; C56.1@6694.51,2050.28 cw(c6774.88,2050.28) 6718.05,2107.11
NetC59_1: C59.1 J10.3 R41.2 | length 430.2
  Bottom Layer w20: C59.1@919.51,2050.28 cw(c951.6,2050.28) 928.91,2072.97 ; C59.1@922.98,2031.62 cw(c906.45,2015.08) 929.83,2015.08 cw(c953.21,2015.08) C59.1@936.68,2031.62 ; C59.1@922.98,2057.12 ccw(c906.45,2073.66) 929.83,2073.66 ccw(c953.21,2073.66) C59.1@936.68,2057.12 ; R41.2@929.83,1964.79 C59.1@929.83,2044.37 929.83,2073.88 J10.3@1005.94,2150 ; C59.1@939.51,2050.28 cw(c1019.88,2050.28) 963.05,2107.11 ; J10.3@992.32,2150 cw(c959.44,2150) 982.69,2126.75 cw(c1005.94,2103.49) J10.3@1005.94,2136.38